# Altium PCB JR_expansion.PcbDoc
Units mil, origin at the board's own origin, x right, y up, seen from the top; angles counter-clockwise.
Board outline 1299.21 x 1122.05 mil, 2 copper layers (Top Layer, Bottom Layer); 14 components, 13 nets, 56 pads, 43 vias.
Unrouted connection lines stored in the file: 13.
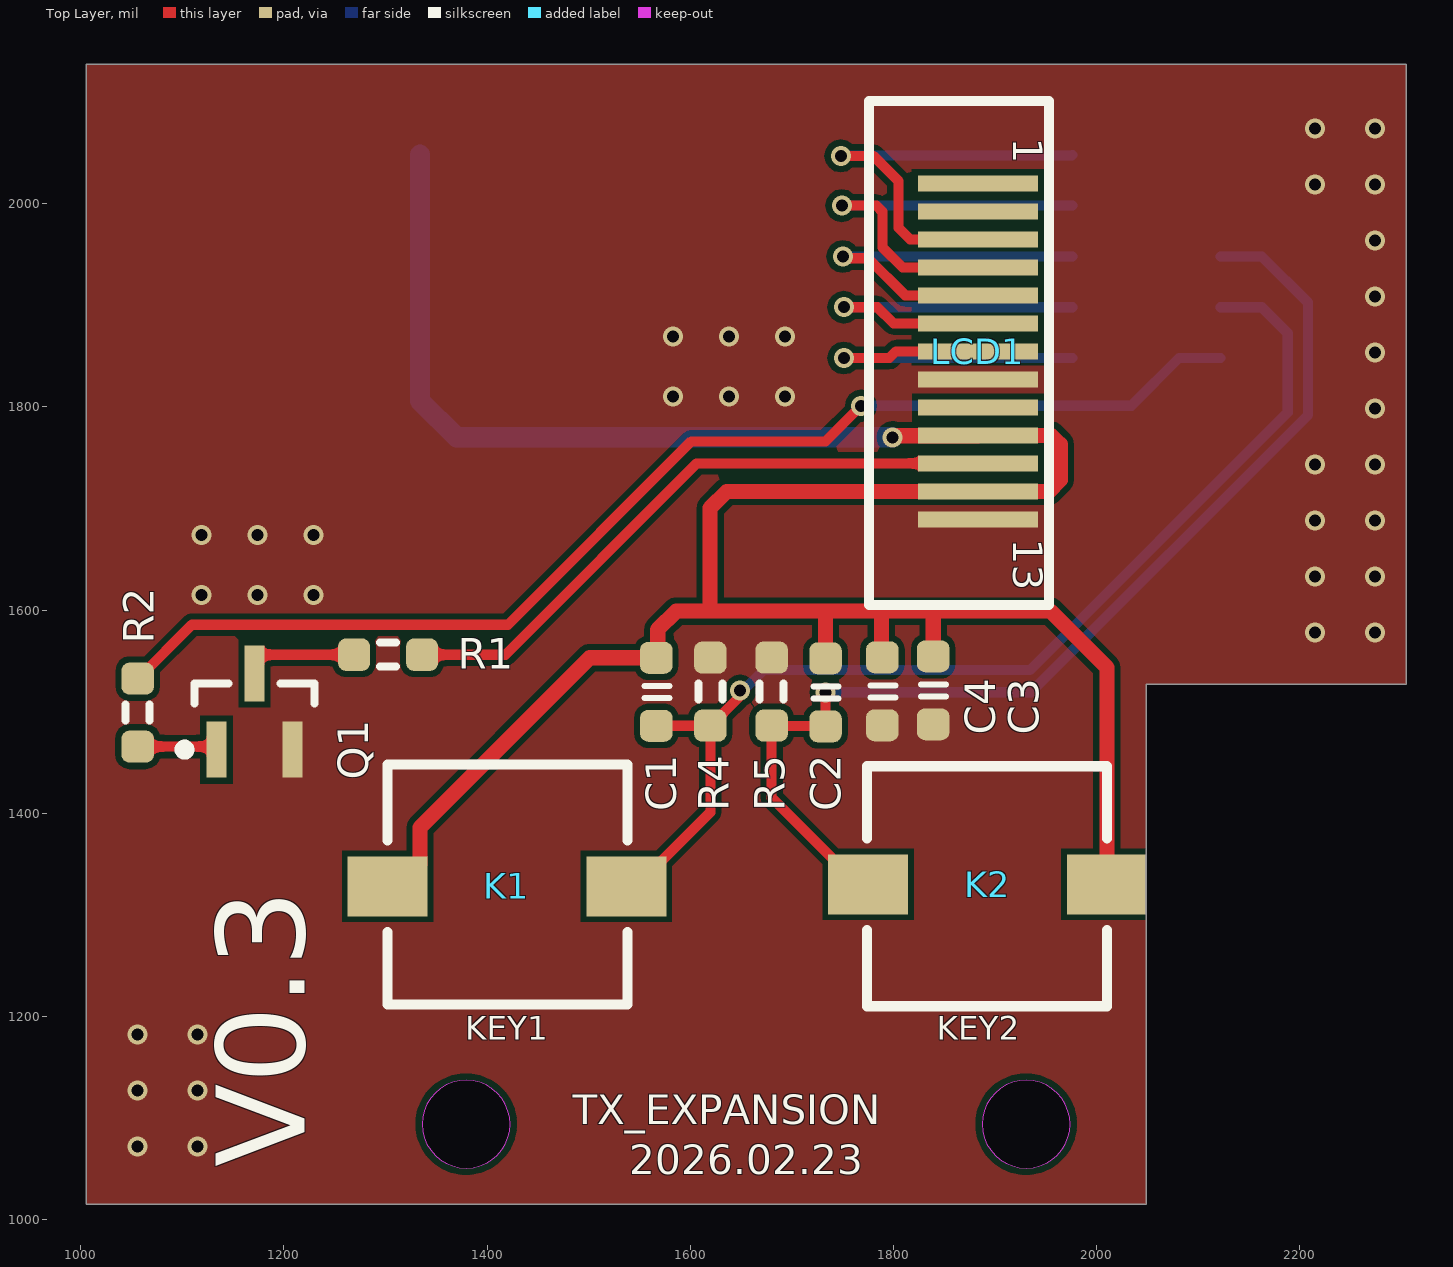
[diagram p0: Top Layer view]
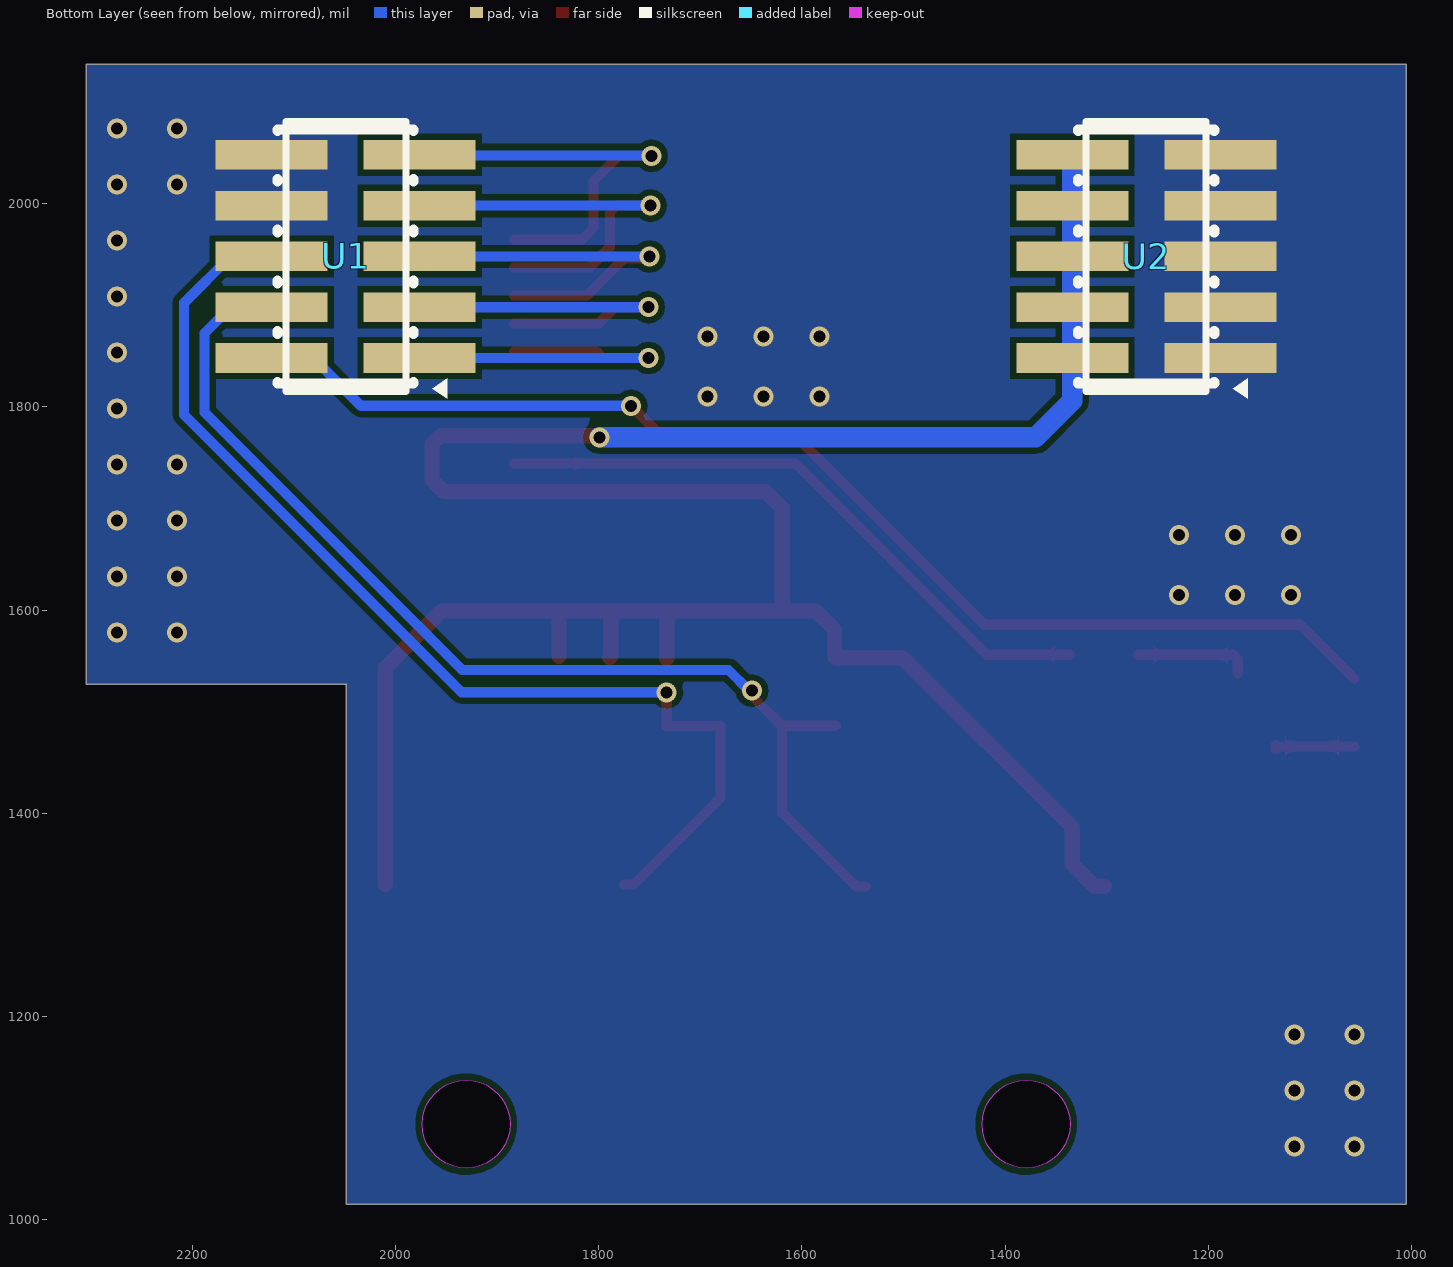
[diagram p1: Bottom Layer view, seen from below]

## Layer stack, top to bottom
Top Solder: solder mask 0.4, Solder Resist, Dk 3.5
Top Layer: signal copper 1.4
Dielectric 1: dielectric 12.6, FR-4, Dk 4.8
Bottom Layer: signal copper 1.4
Bottom Solder: solder mask 0.4, Solder Resist, Dk 3.5

## Board outline
1005.25,1015.25 1005.25,2137.3 2304.46,2137.3 2304.46,1527.06 2048.56,1527.06 2048.56,1015.25
cut-out: 1887.14,1093.99 ccw(c1930.45,1093.99) 1930.45,1050.68 ccw(c1930.45,1093.99) 1973.75,1093.99 ccw(c1930.45,1093.99) 1930.45,1137.3 ccw(c1930.45,1093.99)
cut-out: 1335.96,1093.99 ccw(c1379.27,1093.99) 1379.27,1050.68 ccw(c1379.27,1093.99) 1422.57,1093.99 ccw(c1379.27,1093.99) 1379.27,1137.3 ccw(c1379.27,1093.99)

## Design rules (kind name [scope] priority, off if disabled: settings)
Clearance [All] p1: gap=6 ignorepadtopadclearanceinfootprint=FALSE
HoleSize [All] p1: absolutevalues=TRUE maxlimit=100 minlimit=10 maxpercent=80.000 minpercent=20.000
MinimumSolderMaskSliver [All] p1: minsoldermaskwidth=3
PlaneConnect [All] p1: planeconnectstyle=Direct reliefexpansion=20 reliefentries=4 reliefconductorwidth=10 reliefairgap=10
PolygonConnect [All] p1: connectstyle=Direct reliefconductorwidth=10 reliefentries=4 polygonreliefangle="90 Angle" airgapwidth=10
RoutingVias [All] p1: holewidth=11.81 width=19.68 viastyle="Through Hole" minholewidth=11.81 minwidth=19.68 maxholewidth=1181.1 maxwidth=1968.5
SilkToSilkClearance [All] p1: silktosilkclearance=1
SilkToSolderMaskClearance [IsPad] p1: minsilkscreentomaskgap=0 clearancetoexposedcopper=TRUE
SolderMaskExpansion [All] p1: expansion=4 istentingtop=FALSE
Width [All] p1: maxlimit=100 minlimit=6 preferedwidth=10
25 further rules are at their usual default settings.

## Components (designator, comment, footprint, x,y, rotation, side; value= is the part's Value field where it differs from the comment)
C1 "100nf" C0603 1566.51,1519.5 r270 top
C2 "100nf" C0603 1733,1519 r270 top
C3 "100nf" C0603 1839,1521 r270 top
C4 "10uf" C0603 1789,1520 r270 top
K1 "KEY" Key 1302,1328 r0 top
K2 "KEY" Key 2010,1330 r180 top
LCD1 "LCD" "lcd 0.96‘" 1773,1604.91 r0 top
Q1 "BJT_NPN" SOT23 1171,1500 r90 top
R1 "10R" R0603 1302.46,1556 r0 top
R2 "1k" R0603 1056,1499 r270 top
R4 "10k" R0603 1619.67,1519.67 r270 top
R5 "10k" R0603 1679.96,1519.67 r270 top
U1 "2343U-205CNG1SNT01" CONN-SMD_10P-P1.27_XFCN_PZ127VS-12-10-H10-A38 2049,1948 r90 bottom
U2 "2343U-205CNG1SNT01" CONN-SMD_10P-P1.27_XFCN_PZ127VS-12-10-H10-A38 1261,1948 r90 bottom

## Footprints (in the part's own frame and the unit in brackets; to place one, negate y for a bottom-side part, rotate by r counter-clockwise, add the part's x,y. Pads: shape width x height; smd on the part's side, far side on the other; paste and mask are expansions set on the pad)
C0603 [mm] "C0603瓷片电容"
  rrect50% 0.8x0.813 smd: 1(-0.85,0) 2(0.85,0)
  silkscreen extent -0.15,-0.3 0.15,0.33, body extent -0.76,-0.38 0.76,0.38, height 0.76
CONN-SMD_10P-P1.27_XFCN_PZ127VS-12-10-H10-A38 [mm]
  rect 0.74x2.8 smd mask+0.05: 1(-2.54,-1.85) 2(-2.54,1.85) 3(-1.27,-1.85) 4(-1.27,1.85) 5(0,-1.85) 6(0,1.85) 7(1.27,-1.85) 8(1.27,1.85) 9(2.54,-1.85) 10(2.54,1.85)
  silkscreen extent -3.56,-2.54 3.17,1.7
Key [mm]
  rect 2x1.5 smd: 1(0,0) 2(5.969,0)
  silkscreen extent 0,-2.95 6,3.05
"lcd 0.96‘" [mm]
  rect 3x0.4 smd: 1(2.794,10.541) 2(2.794,9.841) 3(2.794,9.141) 4(2.794,8.441) 5(2.794,7.741) 6(2.794,7.041) 7(2.794,6.341) 8(2.794,5.641) 9(2.794,4.941) 10(2.794,4.241) 11(2.794,3.541) 12(2.794,2.841) 13(2.794,2.141)
  silkscreen extent 0.07,0 4.57,12.6
R0603 [mm] "0603电阻"
  rrect50% 0.8x0.813 smd: 1(-0.85,0) 2(0.85,0)
  silkscreen extent -0.2,-0.3 0.2,0.3, body extent -0.76,-0.38 0.76,0.38, height 0.76
SOT23 [mm] "SOT23, 3-Leads, Body 3.0x2.5mm (max), Pitch 0.95mm, IPC Medium Density"
  rect 1.4x0.5 smd: 1(-0.95,0.95) 2(-0.95,-0.95) 3(0.95,0)
  silkscreen extent -1.07,-1.5 0.7,1.87, body extent -1.4,-1.45 1.4,1.45, height 1.29

## Part data
C1 C2 C3 C4: library part CAP, "无极电容", accuracy=20%
Q1: "Transistor"
R1 R2 R4 R5: library part RES, "电阻"
U1 U2: library part "1.27排针 2*5P", JLCPCB Part Class="Extended Part", LCSC Part Name="1.27mm 2x5P U型/环保耐高温/镀金", Manufacturer=华宇创, Add into BOM=yes, Contact Material=磷青铜, Contact Plating=-, Convert to PCB=yes, Datasheet=https://atta.szlcsc.com/upload/public/pdf/source/20181220/C350287_D742F1AEC20B5CCE37A83D869655120C.pdf, Device=2343U-205CNG1SNT01, Holes Structure=2x5P, Insulation Height=-, Manufacturer Part=2343U-205CNG1SNT01, Mounting Type=直插, Name=2343U-205CNG1SNT01, Number of Holes=10, Number of Rows=2, Pitch=1.27mm, Row Spacing=1.27mm, Supplier=LCSC, Supplier Footprint=插件,P=1.27mm, Supplier Part=C350287, Symbol=2343U-205CNG1SNT01

## Via types
v1: diameter 19.68, hole 11.81, Top Layer to Bottom Layer, 43 vias

## Nets (pads, with @x,y where several pads share a name; then routed paths per layer and width w, separated by ;. In a path a pad name is that pad's centre, name@x,y a point inside that pad or via, vN(x,y) a via of type N, cw(c..) or ccw(c..) an arc to the next point about the centre after c; other vN are vias at no path point)
3V3: C1.1 C2.1 C3.1 C4.1 K1.1 K2.1 LCD1.10 LCD1.12 U2.2 U2.4 U2.6 U2.8 U2.10 | length 2614.9
  Top Layer w15: K1.1 1311.84,1328 1333.87,1350.03 1333.87,1385.95 1500.88,1552.96 C1.1 1567.79,1554.24 1567.79,1580.65 1586.14,1599 1619.33,1599 ; C2.1 1733,1597.5 1731.5,1599 ; C4.1 1788,1554.46 1788,1599 ; v1(1799,1770) 1800.27,1770 1801.78,1771.51 1882.63,1771.51 LCD1.10 1955.18,1771.88 1963.95,1763.12 1963.95,1727.95 1952.76,1716.76 LCD1.12 1635.76,1716.76 1619.33,1700.33 1619.33,1599 ; C3.1 1839,1599 ; K2.1 2010,1543.51 1954.51,1599 1839,1599 ; 1619.33,1599 1731.5,1599 ; 1731.5,1599 1788,1599 ; 1788,1599 1839,1599
  Bottom Layer w20: U2.10 U2.8 U2.6 U2.4 U2.2 1333.84,1806 1369.84,1770 v1(1799,1770)
BLK: R2.1 U1.2 | length 1196.5
  Top Layer w10: R2.1 1056.26,1532.46 1109.3,1585.5 1420.5,1585.5 1601,1766 1733,1766 v1(1768,1801)
  Bottom Layer w10: v1(1768,1801) 2034,1801 2081,1848 U1.2
CLK: LCD1.4 U1.7 | length 406.9
  Top Layer w10: v1(1749,1998) 1783.14,1998 1789,1992.14 1789,1957 1808.76,1937.24 LCD1.4
  Bottom Layer w10: v1(1749,1998) U1.7
CS: LCD1.7 U1.1 | length 359.9
  Top Layer w10: v1(1751,1848) 1795.88,1848 1802.44,1854.56 LCD1.7
  Bottom Layer w10: v1(1751,1848) U1.1
DC: LCD1.5 U1.5 | length 375
  Top Layer w10: v1(1750,1948) 1751.84,1946.16 1774.84,1946.16 1811.32,1909.68 LCD1.5
  Bottom Layer w10: v1(1750,1948) U1.5
GND: C3.2 C4.2 LCD1.8 LCD1.13 Q1.2 R4.1 R5.1 U1.8 U1.10 U2.1 U2.3 U2.5 U2.7 U2.9
  other v1: 1056,1072 1115,1072 1056,1127.11 1115,1127.11 1056,1182.22 1115,1182.22 2215,1578 2274,1578 1118.78,1615 1173.89,1615 1229,1615 2215,1633.11 2274,1633.11 1118.78,1674 1173.89,1674 1229,1674 2215,1688.22 2274,1688.22 2215,1743.33 2274,1743.33 2274,1798.44 1582.78,1810 1637.89,1810 1693,1810 2274,1853.56 1582.78,1869 1637.89,1869 1693,1869 2274,1908.67 2274,1963.78 2215,2018.89 2274,2018.89 2215,2074 2274,2074
KEY1: C1.2 K1.2 R4.2 U1.4 | length 1105.2
  Top Layer w10: K1.2 1546.84,1328 1619.67,1400.82 R4.2 ; C1.2 1566.59,1486.12 1619.58,1486.12 R4.2 ; v1(1649,1520.56) 1647.15,1518.71 1647.15,1513.43 1619.92,1486.2 R4.2
  Bottom Layer w10: v1(1649,1520.56) 1651.74,1520.56 1672.18,1541 1934.37,1541 2188,1794.63 2188,1872.39 2162.39,1898 U1.4
KEY2: C2.2 K2.2 R5.2 U1.6 | length 1091.6
  Top Layer w10: v1(1733,1519) C2.2 1732.67,1485.87 1680.29,1485.87 R5.2 1679.96,1415.2 1765.16,1330 K2.2
  Bottom Layer w10: v1(1733,1519) 1935,1519 2208,1792 2208,1902.39 2162.39,1948 U1.6
MOSI: LCD1.3 U1.9 | length 424.6
  Top Layer w10: v1(1748,2047) 1780,2047 1805,2022 1805,1976 1816.2,1964.8 LCD1.3
  Bottom Layer w10: v1(1748,2047) 1748.5,2047.5 1975.66,2047.5 U1.9
NetLCD1_11: LCD1.11 R1.2 | length 625.1
  Top Layer w10: R1.2 1418,1556 1606.32,1744.32 LCD1.11
NetQ1_1: Q1.1 R2.2 | length 83.4
  Top Layer w10: R2.2 1130.66,1465.54 Q1.1 Q1.1@1133.6,1467.16
NetQ1_3: Q1.3 R1.1 | length 113.8
  Top Layer w10: Q1.3 1171,1551.16 1175.84,1556 R1.1
RES: LCD1.6 U1.3 | length 363.7
  Top Layer w10: v1(1751,1898) 1784,1898 1799.88,1882.12 LCD1.6
  Bottom Layer w10: v1(1751,1898) U1.3
pads on no net: LCD1.1 LCD1.2 LCD1.9

## Polygon pours and split planes (outlines as drawn)
GND on Top Layer "Top Layer-No Net" (solid, remove dead copper, pour order 2): 1005.25,1015.25 1005.25,2137.3 2304.46,2137.3 2304.46,1527.06 2048.56,1527.06 2048.56,1015.25
GND on Bottom Layer "Top Layer-No Net1" (solid, remove dead copper, pour order 3): 1005.25,1015.25 1005.25,2137.3 2304.46,2137.3 2304.46,1527.06 2048.56,1527.06 2048.56,1015.25

## Silkscreen, mask and mechanical layers (free items; w line width, h text height)
Top Overlay:
  text "KEY1" at 1378.41,1169.35 h40
  text "KEY2" at 1842.63,1169.35 h40
  text "TX_EXPANSION" at 1484,1084 h50
  text "V0.3" at 1249,1051.52 h150 r90
  text "2026.02.23" at 1540,1035 h50
Bottom Overlay:
  lines w7: 1202.1,1814.95 1320.21,1814.95 1320.21,2080.69 1202.1,2080.69 1202.1,1814.95 ; 1989.5,1814.95 2107.61,1814.95 2107.61,2080.69 1989.5,2080.69 1989.5,1814.95
Top Solder:
  text "SESAME" at 1507,1154 h70
Mechanical 1:
  circle w7: c1379.27,1093.99 r43.31
  circle w7: c1930.45,1093.99 r43.31
  lines w7: 1005.25,1015.25 2048.56,1015.25 2048.56,1527.06 2304.46,1527.06 2304.46,2137.3 1005.25,2137.3 1005.25,1015.25
Mechanical 15:
  lines w7: 1143.05,1625.49 2166.67,1625.49 2166.67,2078.24 1143.05,2078.24 1143.05,1625.49 ; 1300.53,1251.47 ccw(c1339.9,1251.47) 1339.9,1212.1 1497.38,1212.1 ccw(c1497.38,1251.47) 1536.75,1251.47 1536.75,1408.95 ccw(c1497.38,1408.95) 1497.38,1448.32 1339.9,1448.32 ccw(c1339.9,1408.95) 1300.53,1408.95 1300.53,1251.47 ; 1772.97,1251.47 ccw(c1812.34,1251.47) 1812.34,1212.1 1969.82,1212.1 ccw(c1969.82,1251.47) 2009.19,1251.47 2009.19,1408.95 ccw(c1969.82,1408.95) 1969.82,1448.32 1812.34,1448.32 ccw(c1812.34,1408.95) 1772.97,1408.95 1772.97,1251.47

## Text inside footprints (layer, text, board x,y; h text height)
LCD1: Top Overlay "1" at 1908,2064.91 h50 r270; Top Overlay "13" at 1908,1669.91 h50 r270